# Altium PCB Steezy60ALPS.PcbDoc (part 2 of 3)
Units mm, origin at the board's own origin, x right, y up, seen from the top; angles counter-clockwise.
Board outline 284.73 x 94.2 mm, 2 copper layers (Component Side, Bottom Layer), stack 1.571 mm thick; 204 components, 132 nets, 895 pads, 223 vias.
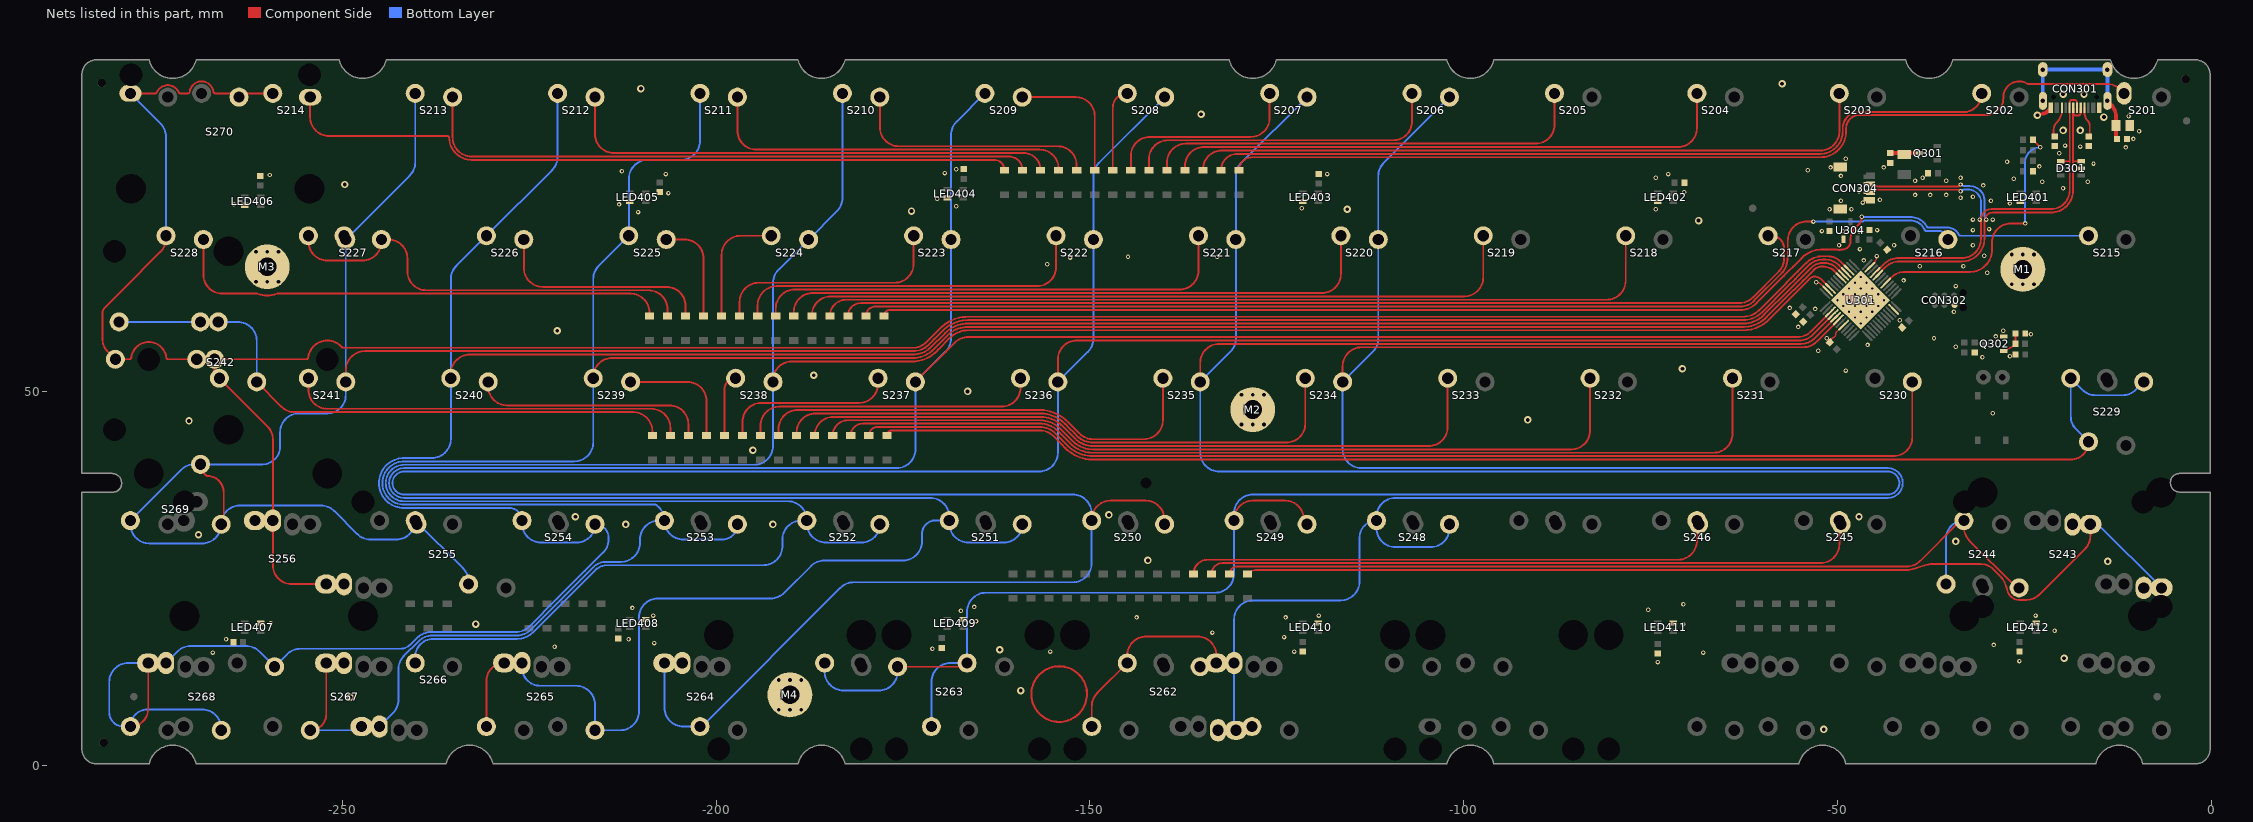
[diagram p2: the nets of this part, all layers, seen from the top]

## Via types
v1: diameter 0.6, hole 0.3, Component Side to Bottom Layer, tented both sides, 156 vias
v2: diameter 1, hole 0.5, Component Side to Bottom Layer, tented both sides, 42 vias
v3: diameter 0.6, hole 0.3, Component Side to Bottom Layer, tented bottom, 25 vias

## Nets (pads, with @x,y where several pads share a name; then routed paths per layer and width w, separated by ;. In a path a pad name is that pad's centre, name@x,y a point inside that pad or via, vN(x,y) a via of type N, cw(c..) or ccw(c..) an arc to the next point about the centre after c; other vN are vias at no path point) (continued)
col5: S206.2 S220.2 S234.2 S248.2 S262.2 U301.6 | length 359.2
  Component Side w0.254: S262.2@-149.747,5.215 -149.747,7.915 cw(c-147.207,7.915) -149.003,9.711 S262.2@-144.999,13.715 -144.999,14.732 cw(c-142.459,14.732) -142.459,17.272 -135.626,17.272 cw(c-135.626,14.732) -133.086,14.732 S262.2@-133.086,13.715 ; S234.2@-116.187,51.315 -116.187,53.413 cw(c-113.647,53.413) -113.647,55.953 -54.594,55.953 ccw(c-54.594,58.493) -52.798,56.697 U301.6@-50.054,59.44
  Bottom Layer w0.254: S262.2@-130.474,4.715 -130.705,4.945 S262.2@-130.705,13.715 -130.705,19.558 cw(c-128.165,19.558) -128.165,22.098 -116.459,22.098 ccw(c-116.459,24.638) -113.919,24.638 -113.919,30.508 cw(c-111.662,30.508) S248.2@-111.662,32.765 -111.662,33.265 cw(c-109.122,33.265) -109.122,35.805 -43.25,35.805 ccw(c-43.25,37.79) -43.25,39.775 -108.712,39.775 -113.647,39.775 cw(c-113.647,42.315) -116.187,42.315 S234.2@-116.187,51.315 -112.169,55.334 ccw(c-113.965,57.13) -111.425,57.13 S220.2@-111.425,70.365 -111.425,78.838 cw(c-108.885,78.838) -110.681,80.634 S206.2@-101.9,89.415 ; S248.2@-111.662,31.75 ccw(c-109.122,31.75) -109.122,29.21 -104.44,29.21 ccw(c-104.44,31.75) -101.9,31.75 S248.2@-101.9,32.265
col6: S207.2 S221.2 S235.2 S249.2 S263.2 U301.5 | length 432.8
  Component Side w0.254: S263.2@-175.718,13.215 -166.931,13.215 S263.2@-166.431,13.715 ; S235.2@-135.237,51.315 -135.237,53.867 cw(c-132.697,53.867) -132.697,56.407 -54.847,56.407 ccw(c-54.847,58.947) -53.051,57.151 U301.5@-50.408,59.794 ; S249.2@-130.712,32.765 -130.712,32.893 cw(c-128.172,32.893) -128.172,35.433 -123.908,35.433 cw(c-123.908,32.893) -121.368,32.893 S249.2@-121.368,32.683
  Bottom Layer w0.254: S263.2@-185.481,13.715 -185.481,12.573 ccw(c-182.941,12.573) -182.941,10.033 -178.258,10.033 ccw(c-178.258,12.573) -175.718,12.573 S263.2@-175.718,13.215 ; S263.2@-171.193,5.215 -171.193,11.175 cw(c-168.653,11.175) -168.653,13.715 S263.2@-166.431,13.715 -166.431,20.574 cw(c-163.891,20.574) -163.891,23.114 -133.252,23.114 ccw(c-133.252,25.654) -130.712,25.654 S249.2@-130.712,32.765 -130.712,33.719 cw(c-128.172,33.719) -128.172,36.259 -43.25,36.259 ccw(c-43.25,37.79) -43.25,39.321 -122.428,39.321 -132.697,39.321 cw(c-132.697,41.861) -135.237,41.861 S235.2@-135.237,51.315 -131.219,55.334 ccw(c-133.015,57.13) -130.475,57.13 S221.2@-130.475,70.365 -130.475,78.838 cw(c-127.935,78.838) -129.731,80.634 S207.2@-120.95,89.415
col7: S208.2 S222.2 S236.2 S250.2 S264.2 U301.4 | length 443.4
  Component Side w0.254: S236.2@-154.287,51.315 -154.287,54.321 cw(c-151.747,54.321) -151.747,56.861 -55.1,56.861 ccw(c-55.1,59.401) -53.304,57.605 U301.4@-50.761,60.147 ; S250.2@-149.762,32.765 -149.762,32.893 cw(c-147.222,32.893) -147.222,35.433 -142.553,35.433 cw(c-142.553,32.893) -140.013,32.893 S250.2@-140.013,32.519
  Bottom Layer w0.254: S264.2@-206.912,13.715 -206.912,7.755 ccw(c-204.372,7.755) -204.372,5.215 S264.2@-202.15,5.215 -201.922,5.215 -183.37,23.767 cw(c-181.574,21.971) -181.574,24.511 -152.302,24.511 ccw(c-152.302,27.051) -149.762,27.051 S250.2@-149.762,32.765 -149.762,33.719 ccw(c-152.302,33.719) -152.302,36.259 -241.75,36.259 cw(c-241.75,37.79) -241.75,39.321 -156.827,39.321 ccw(c-156.827,41.861) -154.287,41.861 S236.2@-154.287,51.315 -150.269,55.334 ccw(c-152.065,57.13) -149.525,57.13 S222.2@-149.525,70.365 -149.525,78.838 cw(c-146.985,78.838) -148.781,80.634 S208.2@-140,89.415
col8: S209.2 S223.2 S237.2 S251.2 S265.2 U301.3 | length 437.8
  Component Side w0.254: S265.2@-230.724,5.215 -230.724,11.334 cw(c-228.343,11.334) S265.2@-228.343,13.715 ; S237.2@-173.337,51.315 -168.081,56.571 cw(c-166.285,54.775) -166.285,57.315 -55.353,57.315 ccw(c-55.353,59.855) -53.557,58.059 U301.3@-51.115,60.501
  Bottom Layer w0.254: S265.2@-226.612,13.715 -226.287,14.04 S265.2@-225.355,14.04 ; S265.2@-225.962,13.715 -225.962,13.11 ccw(c-223.52,13.11) -223.52,10.668 -218.739,10.668 cw(c-218.739,8.128) -216.199,8.128 S265.2@-216.199,4.715 -212.852,4.715 ccw(c-212.852,7.255) -210.312,7.255 -210.312,19.812 cw(c-207.772,19.812) -207.772,22.352 -192.695,22.352 ccw(c-192.695,24.892) -190.899,23.096 -187.307,26.688 cw(c-185.511,24.892) -185.511,27.432 -175.006,27.432 ccw(c-175.006,29.972) -173.482,27.94 ccw(c-175.006,29.972) -172.974,28.448 ccw(c-175.006,29.972) -172.466,29.972 -172.466,30.988 cw(c-170.689,30.988) -170.689,32.765 ; -171.069,32.765 -170.689,32.765 ; S209.2@-164.34,89.915 S209.2@-164.05,89.915 -167.831,86.134 ccw(c-166.035,84.338) -168.575,84.338 S223.2@-168.575,70.365 -168.575,57.13 cw(c-171.115,57.13) -169.319,55.334 S237.2@-173.337,51.315 -173.337,42.315 cw(c-175.877,42.315) -175.877,39.775 -241.75,39.775 ccw(c-241.75,37.79) -241.75,35.805 -171.352,35.805 cw(c-171.352,33.265) -168.812,33.265 S251.2@-168.812,32.765 ; S251.2@-159.05,32.265 cw(c-161.47,32.265) -161.47,29.845 -166.272,29.845 cw(c-166.272,32.385) -168.812,32.385 S251.2@-168.812,32.765 ; -170.689,32.765 S251.2@-168.812,32.765
col9: S210.2 S224.2 S238.2 S252.2 S266.2 U301.46 | length 387.4
  Component Side w0.254: S238.2@-192.387,51.315 -192.387,51.524 cw(c-189.847,51.524) -189.847,54.064 -173.429,54.064 ccw(c-173.429,54.318) -173.399,54.066 -173.152,54.096 ccw(c-173.677,58.42) -170.887,55.075 -170.766,55.176 ccw(c-171.349,55.872) -170.706,55.23 -170.309,55.628 -168.723,57.214 cw(c-166.285,54.775) -166.285,58.223 -62.463,58.223 ccw(c-62.463,60.763) -62.125,58.246 cw(c-62.092,57.994) -62.118,58.246 ; -62.118,58.246 ccw(c-62.592,63.033) -60.606,58.652 ccw(c-62.592,63.033) -59.843,59.086 ccw(c-62.592,63.033) -59.275,59.55 ccw(c-62.592,63.033) -59.195,59.627 ccw(c-62.592,63.033) -59.186,59.636 -55.731,63.092 ccw(c-57.012,64.378) -55.724,63.099 -55.541,63.282 ccw(c-56.359,64.107) -55.534,63.288 -54.331,64.492 ccw(c-54.652,64.813) -54.329,64.493 -54.268,64.555 -54.013,64.809 -53.652,65.17 cw(c-53.086,64.604) -53.651,65.172 cw(c-53.086,64.604) -53.572,65.241 cw(c-53.086,64.604) -53.086,65.405 cw(c-53.086,64.036) -52.118,65.004 U301.46@-51.115,64.001
  Bottom Layer w0.254: -243.413,39.574 ccw(c-241.75,37.79) -244.188,37.848 ccw(c-241.75,37.79) -241.75,35.351 -190.402,35.351 cw(c-190.402,32.811) -187.862,32.811 S252.2@-187.862,32.765 ; -243.412,39.575 cw(c-241.75,37.79) -243.2,39.751 cw(c-241.75,37.79) -241.75,40.229 -204.597,40.229 -194.927,40.229 ccw(c-194.927,42.769) -192.387,42.769 S238.2@-192.387,51.315 -192.387,64.55 cw(c-189.847,64.55) -191.644,66.346 S224.2@-187.625,70.365 -183.844,74.146 ccw(c-185.64,75.942) -183.1,75.942 S210.2@-183.1,89.915 ; S266.2@-240.25,13.715 -240.25,14.526 cw(c-237.831,14.526) -239.543,16.235 ; S252.2@-178.099,32.265 cw(c-180.519,32.265) -180.519,29.845 -185.322,29.845 cw(c-185.322,32.385) -187.862,32.385 S252.2@-187.862,32.765 ; -239.543,16.235 cw(c-237.831,14.526) -239.541,16.237 ; -239.543,16.235 -239.541,16.237 ; -239.541,16.237 cw(c-237.831,14.526) -239.54,16.238 cw(c-237.831,14.526) -237.831,16.945 -226.611,16.945 ccw(c-226.611,19.939) -224.495,17.821 ccw(c-226.611,19.939) -224.493,17.823 -216.263,26.053 cw(c-214.467,24.257) -214.467,26.797 -193.675,26.797 ccw(c-193.675,29.337) -193.545,26.8 ccw(c-193.675,29.337) -191.138,29.207 ccw(c-193.675,29.337) -191.135,29.337 -191.135,30.225 cw(c-188.595,30.225) -188.595,32.765 S252.2@-187.862,32.765
col10: S211.2 S225.2 S239.2 S253.2 S267.2 U301.42 | length 385.6
  Component Side w0.254: S267.2@-254.299,4.715 ccw(c-254.299,6.859) -252.156,6.859 S267.2@-252.156,13.715 ; S267.2@-247.918,4.715 S267.2@-247.418,5.215 ; S239.2@-216.437,51.815 -216.437,51.978 cw(c-213.897,51.978) -213.897,54.518 -173.677,54.518 ccw(c-173.677,58.42) -171.174,55.426 -171.058,55.524 ccw(c-171.349,55.872) -171.027,55.551 -170.503,56.076 -169.044,57.534 cw(c-166.285,54.775) -166.285,58.677 -62.571,58.677 ccw(c-62.571,61.671) -62.47,58.679 ccw(c-62.592,63.033) -59.508,59.956 -56.051,63.413 ccw(c-57.012,64.378) -56.046,63.419 -55.86,63.604 ccw(c-56.359,64.107) -55.857,63.608 -54.652,64.813 ; -54.651,64.814 -54.525,64.939 -53.181,66.284 cw(c-52.025,65.132) -52.069,66.763 cw(c-52.025,65.132) -52.025,66.764 cw(c-52.025,64.41) -52.004,66.764 cw(c-52.025,64.41) -50.871,66.462 ccw(c-50.748,66.684) -50.835,66.446 ccw(c-50.748,66.684) -50.822,66.441 cw(c-51,65.84) -50.498,66.215 ccw(c-50.295,66.368) -50.474,66.188 -50.435,66.149 ; -50.434,66.149 -50.377,66.091 cw(c-52.004,64.46) -50.375,66.09 ; -50.375,66.089 U301.42@-49.701,65.415
  Bottom Layer w0.254: S267.2@-254.299,4.715 -247.918,4.715 S267.2@-247.418,5.215 ; S267.2@-245.037,5.215 -243.241,7.011 ccw(c-245.037,8.807) -242.497,8.807 -242.497,12.871 cw(c-239.957,12.871) -241.753,14.667 -239.765,16.655 cw(c-237.969,14.859) -237.969,17.399 -226.611,17.399 ccw(c-226.611,19.939) -224.815,18.143 -216.451,26.507 cw(c-214.655,24.711) -214.655,27.251 -212.725,27.251 ccw(c-212.725,29.791) -210.185,29.791 -210.185,30.225 cw(c-207.645,30.225) -207.645,32.765 S253.2@-206.912,32.765 ccw(c-204.373,32.765) -204.373,30.226 -199.189,30.226 ccw(c-199.189,32.265) S253.2@-197.15,32.265 ; -243.991,39.62 cw(c-241.75,37.79) -243.773,39.858 ; S253.2@-206.912,32.765 ccw(c-209.452,32.766) -208.002,34.851 ccw(c-208.147,34.643) -208.149,34.897 -241.75,34.897 cw(c-241.75,37.79) -244.618,38.169 cw(c-241.75,37.79) -243.773,39.858 ; S211.2@-202.15,89.915 -202.15,83.566 cw(c-204.69,83.566) -204.69,81.026 -209.135,81.026 ccw(c-209.135,78.486) -211.675,78.486 S225.2@-211.675,70.865 -215.694,66.846 ccw(c-213.897,65.05) -216.437,65.05 S239.2@-216.437,51.815 -216.437,43.223 cw(c-218.977,43.223) -218.977,40.683 -239.395,40.683 -241.75,40.683 ccw(c-241.75,37.79) -241.946,40.676 ccw(c-241.75,37.79) -243.292,40.238 ccw(c-241.75,37.79) -243.294,40.237 ccw(c-241.75,37.79) -243.773,39.858
col11: S212.2 S226.2 S240.2 S254.2 S268.2 U301.41 | length 406.5
  Component Side w0.254: S268.2@-278.349,5.215 ccw(c-278.349,7.596) -275.968,7.596 S268.2@-275.968,13.715 ; S240.2@-235.487,51.815 -235.487,52.432 cw(c-232.947,52.432) -232.947,54.972 -173.677,54.972 ccw(c-173.677,58.42) -171.351,55.875 ; -171.349,55.872 -169.367,57.853 cw(c-166.285,54.775) -166.285,59.131 -62.571,59.131 ccw(c-62.571,61.671) -62.484,59.133 ccw(c-62.592,63.033) -59.836,60.271 ccw(c-62.592,63.033) -59.83,60.277 -56.372,63.735 ccw(c-57.012,64.378) -56.368,63.739 -56.181,63.926 ccw(c-56.359,64.107) -56.179,63.928 -54.973,65.134 -53.501,66.606 cw(c-52.025,65.132) -52.025,67.218 -51.717,67.218 cw(c-51.717,64.996) -50.146,66.567 U301.41@-49.347,65.769
  Bottom Layer w0.254: S268.2@-275.968,13.459 S268.2@-275.968,13.715 -278.638,13.715 ccw(c-278.638,11.175) -281.178,11.175 -281.178,7.112 ccw(c-279.281,7.112) -279.281,5.215 S268.2@-278.349,5.215 cw(c-276.072,5.215) -276.072,7.493 -268.746,7.493 cw(c-268.746,4.953) -266.206,4.953 S268.2@-266.206,4.715 ; S268.2@-274.237,13.715 S268.2@-273.095,12.573 ; S268.2@-273.587,13.715 -272.044,15.258 cw(c-270.248,13.462) -270.248,16.002 -262.901,16.002 cw(c-262.901,13.462) -261.105,15.258 S268.2@-259.062,13.215 -257.4,14.877 cw(c-255.604,13.081) -255.604,15.621 -242.259,15.621 ccw(c-242.259,17.596) -240.863,16.2 -239.953,17.109 cw(c-238.157,15.313) -238.157,17.853 -226.799,17.853 ccw(c-226.799,20.393) -225.003,18.597 -221.234,22.366 -217.558,26.042 -215.084,28.516 ccw(c-216.795,30.226) -214.376,30.226 -214.376,30.441 ccw(c-216.2,30.441) S254.2@-216.2,32.265 cw(c-218.62,32.265) -218.62,29.845 -223.422,29.845 cw(c-223.422,32.385) -225.962,32.385 S254.2@-225.962,32.765 ccw(c-227.64,32.765) -227.64,34.443 -241.75,34.443 cw(c-241.75,37.79) -242.634,34.562 cw(c-241.75,37.79) -243.149,34.749 cw(c-241.75,37.79) -244.242,35.556 cw(c-241.75,37.79) -244.309,35.633 ; -244.602,36.039 ccw(c-241.75,37.79) -244.266,35.583 ; -244.243,35.557 cw(c-241.75,37.79) -244.266,35.583 ; S212.2@-221.2,89.915 -221.2,81.442 cw(c-223.74,81.442) -221.944,79.646 S226.2@-230.725,70.865 -234.744,66.846 ccw(c-232.947,65.05) -235.487,65.05 S240.2@-235.487,51.815 -235.487,43.677 cw(c-238.027,43.677) -238.027,41.137 -240.157,41.137 -241.75,41.137 ccw(c-241.75,37.79) -241.949,41.131 ccw(c-241.75,37.79) -243.529,40.625 ccw(c-241.75,37.79) -244.994,38.613 ccw(c-241.75,37.79) -244.266,35.583
col12: S213.2 S227.2 S241.2 S255.2 S269.2 U301.40 | length 358.4
  Component Side w0.254: S269.2@-268.969,40.29 ccw(c-267.16,40.29) -268.183,38.798 ccw(c-268.039,39.007) -268.045,38.753 cw(c-268.097,36.522) -267.069,38.503 cw(c-268.097,36.522) -266.026,37.354 ; S269.2@-266.206,32.265 -265.865,32.606 -265.865,36.522 ccw(c-268.097,36.522) -266.026,37.354 ; S241.2@-249.537,51.315 -249.537,52.886 cw(c-246.997,52.886) -246.997,55.426 -173.677,55.426 ccw(c-173.677,58.42) -171.56,56.303 -170.827,57.035 -169.688,58.175 cw(c-166.285,54.775) -166.285,59.585 -62.592,59.585 ccw(c-62.592,63.033) -60.883,60.038 ccw(c-62.592,63.033) -60.156,60.593 ccw(c-62.592,63.033) -60.152,60.597 -56.692,64.057 ccw(c-57.012,64.378) -56.689,64.059 -56.501,64.248 ; -56.5,64.249 -55.675,65.073 -55.294,65.454 -53.821,66.928 cw(c-52.025,65.132) -53.818,66.93 cw(c-52.025,65.132) -52.025,67.672 -51.568,67.672 cw(c-51.568,65.198) -49.836,66.965 cw(c-51.568,65.198) -49.819,66.948 cw(c-49.996,66.766) -49.817,66.946 -49.4,66.529 U301.40@-48.994,66.122
  Bottom Layer w0.254: S227.2@-249.775,70.865 cw(c-249.775,70.628) -249.537,70.628 S227.2@-249.537,70.365 ; S213.2@-240.25,89.915 -240.25,80.705 cw(c-242.79,80.705) -240.994,78.909 S227.2@-249.537,70.365 ; S255.2@-233.106,24.265 -233.106,24.569 ccw(c-235.646,24.569) -233.85,26.365 S255.2@-240.25,32.765 cw(c-242.789,32.765) -242.789,30.226 -246.217,30.226 cw(c-246.217,32.766) -248.013,30.97 -251.097,34.054 ccw(c-252.893,32.258) -252.893,34.798 -263.673,34.798 ccw(c-263.673,32.265) S269.2@-266.206,32.265 -266.206,32.258 cw(c-268.746,32.258) -266.243,31.826 cw(c-268.746,32.258) -268.314,29.755 cw(c-268.746,32.258) -268.746,29.718 -275.81,29.718 cw(c-275.81,32.258) -278.35,32.258 S269.2@-278.35,32.765 -271.569,39.546 cw(c-269.773,37.75) -269.773,40.29 S269.2@-268.969,40.29 -260.7,40.29 ccw(c-260.7,42.672) -258.318,42.672 -258.318,44.577 cw(c-255.778,44.577) -255.778,47.117 -251.968,47.117 ccw(c-251.968,49.548) -249.537,49.548 S227.2@-249.537,70.365
col13: S214.2 S228.2 S242.2 S256.2 S270.2 U301.39 | length 351.8
  Component Side w0.254: S270.2@-278.35,89.915 -275.04,89.915 ccw(c-275.04,90.169) -274.808,90.066 cw(c-273.35,89.415) -271.892,90.066 ccw(c-271.66,90.169) -271.66,89.915 -270.658,89.915 ccw(c-270.658,90.169) -270.407,90.134 cw(c-268.825,89.915) -267.243,90.134 ccw(c-266.992,90.169) -266.992,89.915 -263.825,89.915 -259.633,89.915 cw(c-259.633,89.748) S214.2@-259.467,89.748 ; S228.2@-273.587,70.865 -273.587,70.499 cw(c-276.127,70.499) -274.331,68.703 -276.875,66.159 ccw(c-276.693,65.982) -276.89,66.143 cw(c-279.908,68.616) -277.15,65.856 -281.758,61.248 ccw(c-280.924,60.416) -282.058,60.734 ccw(c-280.019,60.309) -282.102,60.309 -282.102,57.138 ccw(c-279.562,57.138) -281.358,55.342 S242.2@-280.361,54.345 -278.481,54.345 ccw(c-278.481,54.599) -278.228,54.57 cw(c-275.888,54.3) -273.548,54.57 ccw(c-273.295,54.599) -273.295,54.345 S242.2@-269.48,54.345 ; S242.2@-266.45,51.439 S242.2@-266.45,51.815 ; S256.2@-261.58,32.765 -260.857,32.765 -259.299,31.207 ; S256.2@-259.878,31.786 -259.299,31.207 ; S256.2@-252.055,24.265 S256.2@-252.155,24.265 -256.759,24.265 cw(c-256.759,26.805) -259.299,26.805 -259.299,31.207 ; -250.711,56.504 ccw(c-252.012,54.3) -253.873,56.057 ; U301.39@-48.64,66.476 -49.546,67.382 ccw(c-51.342,65.586) -51.342,68.126 -52.025,68.126 ccw(c-52.025,65.132) -54.142,67.248 -55.298,66.093 -56.822,64.569 -57.012,64.378 -60.474,60.917 cw(c-62.592,63.033) -60.476,60.915 cw(c-62.592,63.033) -62.592,60.039 -166.285,60.039 ccw(c-166.285,54.775) -170.008,58.497 -171.847,56.658 -171.881,56.624 cw(c-173.677,58.42) -173.677,55.88 -249.88,55.88 cw(c-249.879,56.134) -250.071,55.968 ccw(c-252.012,54.3) -253.873,56.057 ; S242.2@-266.45,51.815 -260.043,45.408 cw(c-261.839,43.612) -259.431,44.42 cw(c-261.839,43.612) -259.299,43.612 S256.2@-259.299,32.765 -259.299,31.207 ; S242.2@-266.45,51.815 -267.099,52.464 S242.2@-267.099,54.345 -254.808,54.345 ccw(c-254.809,54.599) -254.557,54.572 cw(c-252.012,54.3) -253.873,56.057
  Bottom Layer w0.254: S270.2@-278.35,89.915 -274.331,85.896 cw(c-276.127,84.1) -273.587,84.1 S228.2@-273.587,70.865 ; S242.2@-266.641,52.015 -266.484,52.038 -266.441,52.045 S242.2@-266.437,52.045 ; S242.2@-266.45,51.562 -266.703,51.562 S242.2@-266.45,51.815 ; S270.2@-263.825,89.415 S270.2@-263.325,89.915 ; S256.2@-261.58,32.765 S256.2@-261.58,33.488 ; S256.2@-259.199,31.409 S256.2@-259.199,32.765
D_N: CON301.A7 CON301.B7 CON304.2 D301.3 U301.32 | length 68.5
  Component Side w0.254: CON304.2@-45.625,77.75 -45.342,77.75 cw(c-45.342,77.287) -45.014,77.614 ccw(c-44.687,77.942) -44.687,77.479 -33.773,77.479 ccw(c-33.773,77.724) v1(-33.528,77.724) ; U301.32@-44.433,65.769 -44.433,65.781 -44.003,66.211 -44.003,66.229 -43.539,66.693 cw(c-41.743,64.897) -41.743,67.437 -33.35,67.437 ccw(c-33.35,70.434) -30.353,70.434 -30.353,72.822 cw(c-29.21,72.822) -29.21,73.965 -21.469,73.965 ccw(c-21.469,76.962) -18.471,76.962 -18.471,80.899 ; CON301.A7@-18.471,87.948 -18.471,80.899 ; D301.3@-17.355,80.833 -18.405,80.833 cw(c-18.405,80.899) -18.471,80.899 ; CON301.A7@-18.427,87.275 ccw(c-18.1,87.275) -18.1,86.948 ; CON301.A7@-18.427,87.275 ccw(c-18.1,87.275) -18.1,86.948 ; CON301.A7@-18.427,87.275 CON301.A7@-18.427,87.894 ; CON301.A7@-18.427,87.894 ccw(c-18.681,87.894) CON301.A7@-18.45,88 cw(c-18.681,87.894) CON301.A7@-18.427,87.894 ; -18.1,86.948 -17.8,86.948 ; -17.8,86.948 ccw(c-17.8,87.275) CON301.B7@-17.473,87.275 ; -17.8,86.948 ccw(c-17.8,87.275) CON301.B7@-17.473,87.275 ; CON301.B7@-17.473,87.275 CON301.B7@-17.473,87.894 ; CON301.B7@-17.473,87.894 cw(c-17.219,87.894) CON301.B7@-17.45,88 ccw(c-17.219,87.894) CON301.B7@-17.473,87.894
  Bottom Layer w0.254: v1(-33.528,77.724) cw(c-33.528,77.498) -33.368,77.658 ccw(c-33.007,78.019) -33.007,77.508 -32.296,77.508 cw(c-32.296,75.527) -30.315,75.527 -30.315,73.546 ccw(c-29.804,73.546) -30.165,73.185 cw(c-30.325,73.025) v1(-30.099,73.025)
D_P: CON301.A6 CON301.B6 CON304.3 D301.4 U301.33 | length 67.2
  Component Side w0.254: CON304.3@-45.625,76.75 -45.342,76.75 ccw(c-45.342,77.213) -45.014,76.886 cw(c-44.687,76.558) -44.687,77.021 -33.714,77.021 cw(c-33.714,76.835) v1(-33.528,76.835) ; U301.33@-44.786,66.122 -44.774,66.122 -44.344,66.552 -44.326,66.552 -43.861,67.017 cw(c-41.744,64.9) -43.86,67.019 cw(c-41.744,64.9) -41.744,67.894 -33.35,67.894 ccw(c-33.35,70.434) -30.81,70.434 v1@-30.81,72.822 ; v1@-30.81,73.011 cw(c-29.399,73.011) -30.75,73.418 cw(c-29.399,73.011) -29.399,74.422 -21.469,74.422 ccw(c-21.469,76.962) -18.929,76.962 -18.929,80.772 ; D301.4@-20.105,80.833 -18.99,80.833 cw(c-18.99,80.772) -18.929,80.772 ; CON301.B6@-18.929,87.948 -18.929,80.772 ; CON301.B6@-18.927,88.107 cw(c-19.181,88.106) CON301.B6@-18.95,88 ccw(c-19.181,88.106) CON301.B6@-18.927,88.107 ; CON301.B6@-18.927,88.107 -18.927,88.725 ; -18.927,88.725 cw(c-18.6,88.725) -18.6,89.052 ; -18.927,88.725 cw(c-18.6,88.725) -18.6,89.052 ; -18.6,89.052 -18.3,89.052 ; -18.3,89.052 cw(c-18.3,88.725) -17.973,88.725 ; -18.3,89.052 cw(c-18.3,88.725) -17.973,88.725 ; CON301.A6@-17.973,88.106 ccw(c-17.719,88.106) CON301.A6@-17.95,88 cw(c-17.719,88.106) CON301.A6@-17.973,88.106 ; CON301.A6@-17.973,88.106 -17.973,88.725
  Bottom Layer w0.254: v1(-33.528,76.835) ccw(c-33.528,77.061) -33.368,76.901 cw(c-33.007,76.54) -33.007,77.051 -32.536,77.051 cw(c-32.536,75.287) -30.772,75.287 -30.772,73.546 cw(c-31.283,73.546) -30.922,73.185 ccw(c-30.762,73.025) v1(-30.988,73.025)
GND: C301.1 C302.1 C303.1 C304.1 C305.1 C306.1 C307.1 C308.1 C310.2 C312.1 C401.1 C402.1 C403.1 C404.1 C405.1 C406.1 C407.1 C408.1 C409.1 C410.1 C411.1 C412.1 CON301.A1B12 CON301.B1A12 CON302.5 CON304.4 CON304.5 D301.2 L301.1 LED401.3 LED402.3 LED403.3 LED404.3 LED405.3 LED406.3 LED407.3 LED408.3 LED409.3 LED410.3 LED411.3 LED412.3 M1.1 M2.1 M3.1 M4.1 Q302.2 R301.2 R302.2 R304.2 R305.2 R307.2 U301.8 U301.23 U301.35 U301.47 U304.1 | length 45
  Component Side w0.203: v1(-52.832,64.643) cw(c-52.832,63.755) -52.473,64.567 cw(c-52.832,63.755) -52.204,64.383 U301.47@-51.469,63.648 ; C302.1@-51.006,56.594 -50.861,56.907 -50.86,56.909 ccw(c-51.003,57.052) -50.805,57.007 -50.795,57.052 cw(c-50.597,57.006) -50.649,57.203 ccw(c-50.8,57.785) -50.201,57.844 cw(c-49.999,57.862) -50.143,58.005 -49.474,58.674 cw(c-49.331,58.531) -49.349,58.733 -49.348,58.732 U301.8@-49.347,58.733 ; U301.35@-45.493,66.83 -45.135,67.188 ccw(c-46.096,68.149) v1(-44.737,68.149)
  Component Side w0.254: CON301.B1A12@-21.605,88.5 CON301.B1A12@-21.45,88.5
  Component Side w0.279: -150.392,9.68 cw(c-154.11,9.556) -150.392,9.694
  Component Side w0.5: v2@-23.241,87.122 -23.066,87.122 ccw(c-23.066,87.622) -22.994,87.127 -22.448,87.207 ccw(c-22.521,87.702) -22.333,87.238 cw(c-21.971,86.36) -22.264,87.264 ccw(c-22.42,87.739) -22.093,87.361 ccw(c-22.52,88.265) -21.653,87.766 cw(c-21.221,87.514) -21.608,87.831 -21.5,87.831 CON301.B1A12@-21.45,88
  Bottom Layer w0.203: v3(-49.223,61.473) v3(-46.112,64.584) ; v3(-48.446,60.695) v3(-46.89,62.251) -46.112,63.029 v3(-45.334,63.807) ; v3(-46.89,65.362) v3(-46.112,64.584) ; v3(-43.779,62.251) v3(-44.557,63.029) v3(-45.334,63.807) ; v3(-46.112,64.584) v3(-45.334,63.807)
  other v1: -74.037,13.843 -25.65,13.97 -267.331,15.113 -67.941,15.113 -155.317,15.24 -122.678,15.24 -171.065,15.621 -221.611,15.875 -29.079,16.129 -208.276,16.383 -265.553,16.891 -211.705,16.891 -124.031,17.189 -133.6,17.78 -20.951,18.034 -70.608,18.923 -259.584,19.05 -165.227,19.304 -143.76,19.812 -123.821,19.812 -208.407,20.066 -119.376,20.066 -23.491,20.066 -167.255,20.701 -75.307,20.828 -211.197,21.082 -165.477,21.209 -70.608,21.59 -29.21,47.117 -48.895,52.832 -30.607,54.61 -26.924,54.737 -52.578,55.499 -34.163,56.007 -45.974,56.261 -51.435,57.15 -37.084,57.15 -28.829,57.404 -24.124,57.692 -27.813,58.166 -55.245,58.674 -41.656,59.563 -34.417,60.706 -52.959,61.087 -56.388,61.214 -34.163,64.135 -41.148,64.897 -29.972,65.913 -38.989,66.802 -33.147,66.802 -155.698,67.056 -46.482,67.564 -152.65,67.945 -144.903,68.072 -132.965,68.072 -30.353,68.199 -46.99,69.088 -49.784,69.596 -42.418,69.596 -31.877,69.596 -52.07,71.501 -49.276,71.501 -47.117,71.501 -44.704,71.628 -31.877,71.628 -29.718,71.755 -31.877,73.025 -29.21,73.025 -210.435,74.041 -74.291,74.422 -51.054,74.422 -48.133,74.422 -121.662,74.549 -167.89,74.803 -264.537,75.057 -212.979,75.057 -26.924,75.184 -46.609,75.311 -49.53,75.565 -29.464,75.565 -44.323,75.692 -170.43,75.819 -33.528,75.946 -31.877,76.073 -39.624,76.327 -37.592,76.327 -35.433,76.327 -206.371,76.581 -70.481,76.708 -47.117,76.835 -19.812,77.216 -30.48,77.597 -22.606,78.105 -16.51,78.105 -39.624,78.232 -35.433,78.232 -26.416,78.486 -74.291,78.613 -38.608,78.613 -33.528,78.613 -49.53,78.867 -259.711,78.994 -206.752,79.121 -118.233,79.121 -72.64,79.121 -169.414,79.248 -212.594,79.502 -53.975,79.629 -167.89,79.756 -50.927,80.01 -43.815,80.01 -22.987,80.137 -15.748,80.518 -27.305,80.772 -48.895,81.153 -20.32,81.915 -11.43,82.677 -17.526,82.804 -19.558,82.931 -10.414,83.82 -9.652,84.836 -11.049,86.868
  other v2: -51.816,4.826 -248.92,9.144 -159.258,10.033 -19.685,14.351 -162.052,15.494 -232.156,18.923 -13.843,27.305 -142.24,27.432 -34.163,29.972 -269.24,30.861 -212.09,32.258 -192.405,32.258 -218.821,33.274 -47.117,33.274 -147.447,33.528 -195.072,42.164 -270.51,46.101 -91.44,46.228 -166.37,50.038 -186.944,52.197 -70.739,53.086 -221.234,58.166 -68.58,72.898 -173.863,74.168 -115.57,74.422 -249.682,77.724 -19.812,84.963 -17.526,84.963 -14.351,86.741 -23.241,86.995 -135.128,87.122 -19.812,89.789 -17.018,89.789 -210.058,90.551 -57.404,91.186
  other v3: -46.89,59.14 -47.668,59.917 -46.112,59.917 -46.89,60.695 -45.334,60.695 -47.668,61.473 -46.112,61.473 -44.557,61.473 -50.001,62.251 -48.446,62.251 -45.334,62.251 -49.223,63.029 -47.668,63.029 -46.112,63.029 -48.446,63.807 -46.89,63.807 -47.668,64.584
LED: R308.2 U301.29 | length 35.8
  Component Side w0.254: U301.29@-43.372,64.708 -42.784,65.296 cw(c-40.988,63.5) -40.988,66.04 -32.258,66.04 ccw(c-32.258,68.961) -29.337,68.961 -29.337,69.977 cw(c-26.797,69.977) -26.797,72.517 v1(-24.892,72.517) ; R308.2@-23.861,83.693 v1(-22.871,82.703) cw(c-22.896,82.677) v1@-22.86,82.677
  Bottom Layer w0.254: v1(-24.892,72.517) -24.892,80.681 cw(c-22.871,80.681) v1(-22.871,82.703)
NetC306_2: C306.2 F301.1 Q301.3 | length 3.9
  Component Side w0.5: C306.2@-42.926,81.93 -39.046,81.93 Q301.3@-39.046,81.915
NetC309_2: C309.2 Q302.1 R305.1 | length 3.2
  Component Side w0.254: Q302.1@-27.76,55.466 -27.387,55.614 -26.454,56.118 C309.2@-26.181,56.416 -26.178,56.714 -26.178,57.487 R305.1@-26.177,57.785
NetC312_2: C312.2 CON301.S1 L301.2 | length 22.5
  Component Side w0.5: CON301.S1@-13.88,88.915 -13.475,88.51 cw(c-15.271,86.714) -12.731,86.714 L301.2@-12.731,85.598 -12.731,84.165 ccw(c-12.243,84.165) C312.2@-12.588,83.82
  Bottom Layer w0.5: CON301.S1@-22.52,88.915 CON301.S1@-22.52,93.095 CON301.S1@-13.88,93.095 CON301.S1@-13.88,88.915
NetCON301_A5: CON301.A5 R301.1 | length 4.1
  Component Side w0.254: CON301.A5@-16.95,88 -16.95,87.295 ccw(c-15.448,87.295) -16.51,86.233 cw(c-17.123,85.62) -16.256,85.62 -16.256,84.277 cw(c-16.383,84.277) R301.1@-16.383,84.15
NetCON301_B5: CON301.B5 R302.1 | length 4.7
  Component Side w0.254: R302.1@-20.955,84.15 cw(c-20.955,84.277) -21.082,84.277 -21.082,85.059 cw(c-19.781,85.059) -20.701,85.979 -20.694,85.986 ccw(c-22.49,87.782) -19.95,87.782 CON301.B5@-19.95,88 CON301.B5@-19.95,88.5
NetD201_1: D201.1 S201.1 | length 125.9
  Component Side w0.254: D201.1@-130.048,79.635 cw(c-128.314,79.635) -128.314,81.369 -52.29,81.369 ccw(c-52.29,84.817) -49.423,82.902 ccw(c-52.29,84.817) -48.842,84.817 -48.842,85.235 cw(c-47.082,85.235) -48.788,85.666 cw(c-47.082,85.235) -47.082,86.995 -38.596,86.995 -30.099,86.995 ccw(c-30.099,89.281) -27.813,89.281 cw(c-25.908,89.281) -27.801,89.495 ccw(c-28.053,89.524) -27.8,89.512 cw(c-25.7,89.415) -24.626,91.222 ccw(c-24.496,91.44) -24.496,91.186 -13.973,91.186 cw(c-13.973,88.646) -12.177,90.442 S201.1@-11.65,89.915
NetD202_1: D202.1 S202.1 | length 107.8
  Component Side w0.254: D202.1@-132.461,79.635 cw(c-130.273,79.635) -130.273,81.823 -52.29,81.823 ccw(c-52.29,84.817) -49.447,83.878 ccw(c-52.29,84.817) -49.296,84.817 -49.296,85.235 cw(c-47.082,85.235) -49.296,85.238 cw(c-47.082,85.235) -49.147,86.034 cw(c-47.082,85.235) -47.082,87.449 -32.666,87.449 ccw(c-32.666,87.703) -32.603,87.457 ccw(c-33.239,89.915) S202.1@-30.7,89.915
NetD203_1: D203.1 S203.1 | length 93.2
  Component Side w0.254: D203.1@-134.874,79.635 -134.874,79.737 cw(c-132.334,79.737) -132.334,82.277 -52.29,82.277 ccw(c-52.29,84.817) -49.75,84.817 S203.1@-49.75,89.915
NetD204_1: D204.1 S204.1 | length 76.6
  Component Side w0.254: D204.1@-137.287,79.635 -137.287,80.191 cw(c-134.747,80.191) -134.747,82.731 -71.34,82.731 ccw(c-71.34,85.271) -68.8,85.271 S204.1@-68.8,89.915
NetD205_1: D205.1 S205.1 | length 59.9
  Component Side w0.254: D205.1@-139.7,79.635 -139.7,80.645 cw(c-137.16,80.645) -137.16,83.185 -90.39,83.185 ccw(c-90.39,85.725) -87.85,85.725 S205.1@-87.85,89.915
NetD206_1: D206.1 S206.1 | length 43.3
  Component Side w0.254: D206.1@-142.113,79.635 -142.113,81.099 cw(c-139.573,81.099) -139.573,83.639 -109.44,83.639 ccw(c-109.44,86.179) -106.9,86.179 S206.1@-106.9,89.915
NetD207_1: D207.1 S207.1 | length 26.7
  Component Side w0.254: D207.1@-144.526,79.635 -144.526,81.553 cw(c-141.986,81.553) -141.986,84.093 -128.49,84.093 ccw(c-128.49,86.633) -125.95,86.633 S207.1@-125.95,89.915
NetD208_1: D208.1 S208.1 | length 11.4
  Component Side w0.254: D208.1@-146.939,79.635 -146.939,87.976 cw(c-145,87.976) S208.1@-145,89.915
NetD209_1: D209.1 S209.1 | length 18.4
  Component Side w0.254: S209.1@-159.05,89.415 -151.892,89.415 cw(c-151.892,86.875) -149.352,86.875 D209.1@-149.352,79.635
NetD210_1: D210.1 S210.1 | length 34.2
  Component Side w0.254: -178.1,85.09 -178.1,85.382 ; S210.1@-178.1,89.415 -178.1,85.382 ; D210.1@-151.765,79.635 -151.765,80.302 ccw(c-154.305,80.302) -154.305,82.842 -175.56,82.842 cw(c-175.56,85.382) -178.1,85.382
NetD211_1: D211.1 S211.1 | length 50.6
  Component Side w0.254: S211.1@-197.15,89.415 -197.15,84.928 ccw(c-194.61,84.928) -194.61,82.388 -156.718,82.388 cw(c-156.718,79.848) -154.178,79.848 D211.1@-154.178,79.635
NetD212_1: D212.1 S212.1 | length 67.3
  Component Side w0.254: S212.1@-216.2,89.415 -216.2,84.474 ccw(c-213.66,84.474) -213.66,81.934 -158.89,81.934 cw(c-158.89,79.635) D212.1@-156.591,79.635
NetD213_1: D213.1 S213.1 | length 84.1
  Component Side w0.254: S213.1@-235.25,89.415 -235.25,84.02 ccw(c-232.71,84.02) -232.71,81.48 -160.849,81.48 cw(c-160.849,79.635) D213.1@-159.004,79.635
NetD214_1: D214.1 S214.1 | length 99.6
  Component Side w0.254: S214.1@-254.3,89.415 -254.3,86.741 ccw(c-251.76,86.741) -251.76,84.201 -235.958,84.201 cw(c-235.957,83.947) -235.703,83.953 ccw(c-232.71,84.02) -232.71,81.026 -162.808,81.026 cw(c-162.808,79.635) D214.1@-161.417,79.635
NetD215_1: D215.1 S215.1 | length 168.6
  Component Side w0.254: D215.1@-177.546,60.135 cw(c-176.734,60.135) -176.734,60.947 -62.968,60.947 ccw(c-62.968,63.941) -60.852,61.823 ccw(c-62.968,63.941) -60.85,61.825 -57.845,64.83 -57.176,65.499 -56.511,66.164 -55.941,66.734 cw(c-55.618,66.415) -55.938,66.737 -54.787,67.888 cw(c-52.025,65.132) -52.212,69.03 cw(c-52.07,66.791) -52.07,69.034 -50.453,69.034 ccw(c-50.453,70.519) -50.209,69.054 cw(c-50.169,68.803) -50.062,69.034 cw(c-50.169,68.803) -50.059,69.032 ccw(c-49.784,69.596) -49.547,69.016 cw(c-49.452,68.78) -49.453,69.034 -49.33,69.034 ccw(c-49.33,70.104) -48.26,70.104 -48.26,70.358 cw(c-46.114,70.358) -48.002,71.378 cw(c-46.114,70.358) -47.658,71.849 cw(c-46.114,70.358) -47.631,71.876 -47.185,72.322 ccw(c-48.269,73.406) v1(-46.736,73.406)
  Bottom Layer w0.254: v1(-46.736,73.406) -46.699,73.369 -40.289,73.369 ccw(c-40.289,73.623) -40.283,73.369 cw(c-40.225,70.865) -38.041,72.091 ccw(c-37.819,72.215) -38.04,72.09 ccw(c-37.819,72.215) -37.819,71.961 -35.273,71.961 ccw(c-35.273,72.215) -35.268,71.961 ; -35.18,71.961 ccw(c-35.225,70.365) -35.266,71.961 cw(c-35.225,70.365) -33.767,71.016 ccw(c-33.535,71.119) -33.535,70.865 S215.1@-16.412,70.865
NetD216_1: D216.1 S216.1 | length 153.7
  Component Side w0.254: D216.1@-179.959,60.135 cw(c-178.693,60.135) -178.693,61.401 -62.968,61.401 ccw(c-62.968,63.941) -61.172,62.145 -57.498,65.819 ccw(c-59.429,67.753) -57.495,65.822 ccw(c-59.429,67.753) -56.7,67.601 -56.642,68.625 ccw(c-56.896,68.64) -56.642,68.64 -56.642,70.231 cw(c-54.102,70.231) -54.102,72.771 v1(-53.213,72.771)
  Bottom Layer w0.254: v1(-53.213,72.771) -46.799,72.771 ccw(c-46.799,73.025) -46.773,72.772 -46.698,72.78 cw(c-46.672,72.527) -46.691,72.781 ccw(c-46.736,73.406) -46.401,72.876 cw(c-46.265,72.661) -46.266,72.915 -40.282,72.915 ccw(c-40.283,73.169) -40.275,72.915 ; -40.274,72.915 cw(c-40.225,70.865) -38.435,71.865 ccw(c-37.819,72.215) -38.384,71.788 cw(c-38.586,71.635) -38.333,71.657 ; S216.1@-35.225,70.365 ccw(c-36.361,70.365) -36.361,71.501 -38.105,71.501 cw(c-38.099,71.755) -38.333,71.656 ; -38.333,71.657 ccw(c-38.099,71.755) -38.333,71.656 ; -38.333,71.657 cw(c-40.225,70.865) -38.333,71.656 ; -38.333,71.657 cw(c-40.225,70.865) -38.333,71.656
NetD217_1: D217.1 S217.1 | length 133.5
  Component Side w0.254: D217.1@-182.372,60.135 cw(c-180.652,60.135) -180.652,61.855 -63.156,61.855 ccw(c-63.156,64.395) -61.36,62.599 -57.818,66.142 ccw(c-59.429,67.753) -57.15,67.753 -57.15,69.215 ccw(c-58.8,69.215) -58.8,70.865 S217.1@-59.275,70.865
NetD218_1: D218.1 S218.1 | length 115.2
  Component Side w0.254: D218.1@-184.785,60.135 cw(c-182.611,60.135) -182.611,62.309 -80.865,62.309 ccw(c-80.865,64.849) -78.325,64.849 S218.1@-78.325,70.865
NetD219_1: D219.1 S219.1 | length 98.4
  Component Side w0.254: D219.1@-187.198,60.135 -187.198,60.223 cw(c-184.658,60.223) -184.658,62.763 -99.915,62.763 ccw(c-99.915,65.303) -97.375,65.303 S219.1@-97.375,70.865
NetD220_1: D220.1 S220.1 | length 81.7
  Component Side w0.254: D220.1@-189.611,60.135 -189.611,60.677 cw(c-187.071,60.677) -187.071,63.217 -118.965,63.217 ccw(c-118.965,65.757) -116.425,65.757 S220.1@-116.425,70.865
NetD221_1: D221.1 S221.1 | length 64.6
  Component Side w0.254: D221.1@-192.024,60.135 -192.024,61.131 cw(c-189.484,61.131) -189.484,63.671 -138.015,63.671 ccw(c-138.015,66.211) -135.475,66.211 S221.1@-135.475,70.411
NetD222_1: D222.1 S222.1 | length 48.5
  Component Side w0.254: D222.1@-194.437,60.135 -194.437,61.585 cw(c-191.897,61.585) -191.897,64.125 -157.065,64.125 ccw(c-157.065,66.665) -154.525,66.665 S222.1@-154.525,70.865
NetD223_1: D223.1 S223.1 | length 31.8
  Component Side w0.254: D223.1@-196.85,60.135 -196.85,62.039 cw(c-194.31,62.039) -194.31,64.579 -176.115,64.579 ccw(c-176.115,67.119) -173.575,67.119 S223.1@-173.575,70.865
NetD224_1: D224.1 S224.1 | length 16.3
  Component Side w0.254: D224.1@-199.263,60.135 -199.263,68.325 cw(c-196.723,68.325) -196.723,70.865 S224.1@-192.625,70.865
NetD225_1: D225.1 S225.1 | length 14.1
  Component Side w0.254: S225.1@-206.675,70.365 -204.216,70.365 cw(c-204.216,67.825) -201.676,67.825 D225.1@-201.676,60.135
NetD226_1: D226.1 S226.1 | length 30.7
  Component Side w0.254: S226.1@-226.065,71.125 -226.065,70.617 S226.1@-225.725,70.277 ; S226.1@-225.725,70.365 S226.1@-225.725,70.277 ; D226.1@-204.089,60.135 -204.089,61.487 ccw(c-206.629,61.487) -206.629,64.027 -223.185,64.027 cw(c-223.185,66.567) -225.725,66.567 S226.1@-225.725,70.277
NetD227_1: D227.1 S227.1 | length 58.9
  Component Side w0.254: S227.1@-254.537,70.865 -254.537,70.104 ccw(c-251.997,70.104) -251.997,67.564 -247.315,67.564 ccw(c-247.315,70.104) -244.775,70.104 S227.1@-244.775,70.365 -243.84,70.365 cw(c-243.84,67.825) -241.3,67.825 -241.3,66.113 ccw(c-238.76,66.113) -238.76,63.573 -209.042,63.573 cw(c-209.042,61.033) -206.502,61.033 D227.1@-206.502,60.135
NetD228_1: D228.1 S228.1 | length 67.6
  Component Side w0.254: S228.1@-268.587,70.365 -268.587,65.659 ccw(c-266.047,65.659) -266.047,63.119 -261.419,63.119 cw(c-261.418,62.865) -261.333,63.104 ccw(c-260.05,66.715) -258.767,63.104 cw(c-258.682,62.865) -258.681,63.119 -211.455,63.119 cw(c-211.455,60.579) -208.915,60.579 D228.1@-208.915,60.357
NetD229_1: D229.1 S229.1 | length 184.4
  Component Side w0.254: D229.1@-177.165,44.135 cw(c-176.472,44.135) -176.472,44.828 -156.702,44.828 cw(c-156.702,42.288) -154.906,44.084 -153.784,42.962 -153.289,42.467 ccw(c-149.57,46.192) -153.287,42.465 ccw(c-149.57,46.192) -150.582,41.026 -150.105,40.933 ccw(c-150.056,41.182) -150.056,40.928 -18.799,40.928 ccw(c-18.799,43.315) S229.1@-16.412,43.315
  Bottom Layer w0.254: S229.1@-16.412,43.315 -18.05,44.952 cw(c-16.254,46.748) -18.675,45.98 cw(c-16.254,46.748) -18.794,46.748 S229.1@-18.794,51.815 -17.253,50.274 ccw(c-15.457,52.07) -15.457,49.53 -11.868,49.53 ccw(c-11.868,52.07) -10.072,50.274 S229.1@-9.031,51.315
NetD230_1: D230.1 S230.1 | length 150.4
  Component Side w0.254: D230.1@-179.578,44.135 cw(c-178.431,44.135) -178.431,45.282 -156.702,45.282 cw(c-156.702,42.288) -154.586,44.406 cw(c-156.702,42.288) -154.585,44.404 -153.96,43.779 -152.967,42.786 ccw(c-149.57,46.192) -150.327,41.442 -149.971,41.385 ccw(c-149.931,41.636) -149.931,41.382 -42.527,41.382 ccw(c-42.527,43.922) -39.987,43.922 S230.1@-39.987,51.315
NetD231_1: D231.1 S231.1 | length 128.6
  Component Side w0.254: D231.1@-181.991,44.135 cw(c-180.39,44.135) -180.39,45.736 -156.516,45.736 cw(c-156.516,45.482) -156.486,45.734 -156.304,45.713 cw(c-156.702,42.288) -154.266,44.728 cw(c-156.702,42.288) -154.262,44.724 -153.829,44.291 -153.321,43.783 -152.648,43.11 ccw(c-149.57,46.192) -152.646,43.108 ccw(c-149.57,46.192) -149.951,41.853 -149.772,41.837 ccw(c-149.75,42.09) -149.75,41.836 -66.577,41.836 ccw(c-66.577,44.376) -64.037,44.376 S231.1@-64.037,51.398
NetD232_1: D232.1 S232.1 | length 111.8
  Component Side w0.254: D232.1@-184.404,44.135 cw(c-182.349,44.135) -182.349,46.19 -156.516,46.19 cw(c-156.516,45.482) -156.432,46.185 -156.251,46.164 cw(c-156.702,42.288) -153.946,45.05 cw(c-156.702,42.288) -153.94,45.044 -152.631,43.735 -152.328,43.432 ccw(c-149.57,46.192) -152.326,43.43 ccw(c-149.57,46.192) -149.57,42.29 -85.627,42.29 ccw(c-85.627,44.83) -83.087,44.83 S232.1@-83.087,51.361
NetD233_1: D233.1 S233.1 | length 96.5
  Component Side w0.254: D233.1@-186.817,44.135 cw(c-184.308,44.135) -184.308,46.644 -156.516,46.644 cw(c-156.516,45.482) -156.379,46.636 -156.198,46.615 cw(c-156.702,42.288) -153.626,45.372 cw(c-156.702,42.288) -153.62,45.366 -152.309,44.055 -152.007,43.753 ccw(c-149.57,46.192) -152.006,43.752 ccw(c-149.57,46.192) -149.923,42.762 ; -151.431,43.289 ccw(c-149.57,46.192) -149.923,42.762 ; S233.1@-102.137,51.361 -102.137,45.284 cw(c-104.677,45.284) -104.677,42.744 -149.57,42.744 cw(c-149.57,46.192) -149.915,42.761 cw(c-149.57,46.192) -149.923,42.762
NetD234_1: D234.1 S234.1 | length 78.3
  Component Side w0.254: D234.1@-189.23,44.135 -189.23,44.558 cw(c-186.69,44.558) -186.69,47.098 -156.516,47.098 cw(c-156.516,45.482) -156.326,47.087 -156.146,47.066 cw(c-156.702,42.288) -153.306,45.694 cw(c-156.702,42.288) -153.3,45.688 -152.76,45.148 -152.104,44.492 -151.687,44.075 ; -151.686,44.074 ccw(c-149.57,46.192) -149.57,43.198 -123.727,43.198 ccw(c-123.727,45.738) -121.187,45.738 S234.1@-121.187,51.361
NetD235_1: D235.1 S235.1 | length 61.6
  Component Side w0.254: D235.1@-191.643,44.135 -191.643,45.012 cw(c-189.103,45.012) -189.103,47.552 -156.216,47.552 cw(c-156.216,47.298) -156.167,47.547 -155.694,47.455 cw(c-156.702,42.288) -152.985,46.015 ; -152.979,46.009 ccw(c-156.702,42.288) -152.985,46.015 ; S235.1@-140.237,51.361 -140.237,46.192 cw(c-142.777,46.192) -142.777,43.652 -149.57,43.652 cw(c-149.57,46.192) -151.366,44.396 -152.985,46.015
NetD236_1: D236.1 S236.1 | length 39.8
  Component Side w0.254: D236.1@-194.056,44.135 -194.056,45.466 cw(c-191.516,45.466) -191.516,48.006 -161.827,48.006 ccw(c-161.827,50.546) -159.287,50.546 S236.1@-159.287,51.361
NetD237_1: D237.1 S237.1 | length 23.2
  Component Side w0.254: D237.1@-196.469,44.135 -196.469,45.974 cw(c-193.929,45.974) -193.929,48.514 -180.877,48.514 ccw(c-180.877,51.054) -178.337,51.054 S237.1@-178.337,51.361
NetD238_1: D238.1 S238.1 | length 8.1
  Component Side w0.254: D238.1@-198.882,44.135 -198.882,50.321 cw(c-197.387,50.321) S238.1@-197.836,51.746
NetD239_1: D239.1 S239.1 | length 17.2
  Component Side w0.254: S239.1@-211.873,51.98 S239.1@-211.208,51.315 ; S239.1@-211.437,51.315 S239.1@-211.208,51.315 ; D239.1@-201.295,44.135 -201.295,48.775 ccw(c-203.835,48.775) -203.835,51.315 S239.1@-211.208,51.315
NetD240_1: D240.1 S240.1 | length 31.8
  Component Side w0.254: S240.1@-230.487,51.315 -230.487,50.714 ccw(c-227.947,50.714) -227.947,48.174 -206.248,48.174 cw(c-206.248,45.634) -203.708,45.634 D240.1@-203.708,44.135
NetD241_1: D241.1 S241.1 | length 53.9
  Component Side w0.254: S241.1@-254.537,51.815 -254.537,50.26 ccw(c-251.997,50.26) -251.997,47.72 -208.661,47.72 cw(c-208.661,45.18) -206.121,45.18 D241.1@-206.121,44.135
NetD242_1: D242.1 S242.1 | length 80.3
  Component Side w0.254: S242.1@-261.962,51.904 S242.1@-261.412,51.354 ; S242.1@-261.45,51.315 -258.145,48.01 ccw(c-256.349,49.806) -256.349,47.266 -211.074,47.266 cw(c-211.074,44.726) -208.534,44.726 D242.1@-208.534,44.135
  Bottom Layer w0.254: S242.1@-279.861,59.345 S242.1@-268.98,59.345 ; S242.1@-266.599,59.345 -263.99,59.345 cw(c-263.99,56.805) -261.45,56.805 S242.1@-261.45,51.315
NetD243_1: D243.1 S243.1 | length 136.6
  Component Side w0.254: D243.1@-128.905,25.635 cw(c-127.633,24.363) -127.635,26.162 cw(c-127.633,24.363) -127.633,26.162 -125.095,26.162 -40.751,26.162 ccw(c-40.751,29.156) -39.65,26.372 cw(c-39.556,26.136) -39.632,26.378 -38.337,26.784 ; -38.336,26.784 cw(c-37.302,23.495) -37.302,26.943 -30.79,26.943 cw(c-30.79,24.638) -29.158,26.266 -28.815,25.922 -28.243,25.351 ; -28.242,25.35 cw(c-28.564,25.03) -28.226,25.333 -28.176,25.277 cw(c-30.719,22.987) -27.457,24.021 -27.222,23.282 ; -27.084,22.968 cw(c-25.7,23.765) -27.222,23.282 ; S243.1@-16.175,32.265 -16.175,30.724 cw(c-18.715,30.724) -16.919,28.928 -22.935,22.912 cw(c-24.731,24.708) -24.731,22.168 -25.7,22.168 cw(c-25.7,23.765) -27.222,23.282
  Bottom Layer w0.254: S243.1@-18.556,32.265 S243.1@-16.175,32.265 -15.15,32.265 S243.1@-6.65,23.765
NetD244_1: D244.1 S244.1 | length 124.2
  Component Side w0.254: D244.1@-131.318,25.635 cw(c-130.337,25.635) -130.337,26.616 -40.751,26.616 ccw(c-40.751,29.156) -38.955,27.36 -33.55,32.765 S244.1@-33.081,32.765 -33.081,31.883 ccw(c-30.541,31.883) -32.337,30.087 -26.287,24.037 -26.559,23.765 S244.1@-25.7,23.765 ; S244.1@-35.462,24.265 S244.1@-35.462,24.667
  Bottom Layer w0.254: S244.1@-35.462,24.265 -35.462,30.384 cw(c-33.081,30.384) S244.1@-33.081,32.765
NetD245_1: D245.1 S245.1 | length 89.4
  Component Side w0.254: D245.1@-133.731,25.635 cw(c-132.296,25.635) -132.296,27.07 -52.29,27.07 ccw(c-52.29,29.61) -49.75,29.61 S245.1@-49.75,32.765
NetD246_1: D246.1 S246.1 | length 72.6
  Component Side w0.254: D246.1@-136.144,25.635 cw(c-134.255,25.635) -134.255,27.524 -71.34,27.524 ccw(c-71.34,30.064) -68.8,30.064 S246.1@-68.8,32.765